# EAGLE board arduino-uno-temperature-control (EAGLE 9.7.0)

Size 273.51 x 112.33 mm. Coordinates in mm from the lower left corner, seen from the top.
Outline: 0,0 273.51,0 273.51,112.33 0,112.33 0,0
Copper layers (1*16): Top 0.035mm / dielectric 1.5mm / Bottom 0.035mm
Design rules "default": minimum track width 6mil, minimum drill 0.35mm, track to track 6mil, track to pad 6mil, pad to pad 6mil, via to via 6mil, smd to smd 6mil, copper to edge 40mil, drill to drill 6mil, minimum pad ring 10mil, minimum via ring 8mil, stop-mask expansion 4mil, vias tented up to drill 0mil, thermal gap 10mil

## Footprints (pad centres in the part's own frame; a part is rotated, then mirrored left to right if it is on the bottom)
LEDRD254W60D565H860B = drill 0.981 pad 1.581: 1 -1.27,0; 2 1.27,0
MOTOR = drill 1.118 pad 3.15 octagon: + 2.54,0; - -2.54,0
RESAD1016W63L850D250B = drill 0.83 pad 1.43: 1 -5.08,0; 2 5.08,0
HA-06-SM065 = drill 1 pad 1.676: 1 -2.54,-2.54; 2 0,2.54; 3 2.54,-2.54
SG90 = drill 1.016 long: 1 -2.54,0; 2 0,0; 3 2.54,0
ARDUINO-UNO-R3-SHIELD = drill 1.016 pad 1.88: 3.3V 24.13,-2.54; 5V 24.13,0; A0 24.13,12.7; A1 24.13,15.24; A2 24.13,17.78; A3 24.13,20.32; A4 24.13,22.86; A5 24.13,25.4; AREF -24.13,-13.97; D2 -24.13,20.32; D3 -24.13,17.78; D4 -24.13,15.24; D5 -24.13,12.7; D6 -24.13,10.16; D7 -24.13,7.62; D8 -24.13,3.81; D9 -24.13,1.27; D10 -24.13,-1.27; D11 -24.13,-3.81; D12 -24.13,-6.35; D13 -24.13,-8.89; GND@0 24.13,2.54; GND@1 24.13,5.08; GND@2 -24.13,-11.43; IOREF 24.13,-7.62; NC 24.13,-10.16; RES 24.13,-5.08; RX -24.13,25.4; SCL -24.13,-19.05; SDA -24.13,-16.51; TX -24.13,22.86; VIN 24.13,7.62
TO92 = drill 0.813 octagon: 1 -1.27,0; 2 0,1.905; 3 1.27,0
7SEG-X4-I2C = drill 1.016 long: P$1 -3.81,0; P$2 -1.27,0; P$3 1.27,0; P$4 3.81,0

## Placement (x,y rotation side)
D1  RED  [LEDRD254W60D565H860B]  206.12,8.14 180 top
D2  RED  [LEDRD254W60D565H860B]  213.74,8.14 180 top
M1  MOTOR_HDR  [MOTOR]  247.2,35.97 0 top
R1  330  [RESAD1016W63L850D250B]  207.39,18.3 90 top
R2  330  [RESAD1016W63L850D250B]  215.01,18.3 90 top
RPOT2  250k  [HA-06-SM065]  95.96,8.26 0 top
SERVO1  SERVOSG90  [SG90]  260.73,31 0 top
U1  ARDUINO-UNO-R3-SHIELD  [ARDUINO-UNO-R3-SHIELD]  110.88,82.35 270 top
U2  ARDUINO-UNO-R3-SHIELD  [ARDUINO-UNO-R3-SHIELD]  238.99,82.49 270 top
U3  TMP36GT9Z_TO92  [TO92]  126.44,26.04 0 top
U4  RED  [7SEG-X4-I2C]  28.32,39.25 0 top

## Library data of the parts
D1 D2 = Tinkercad; CATEGORY: Opto-Electronic; SUB-CATEGORY: LED; VALUE: LED_RED
M1 R1 R2 RPOT2 SERVO1 U1-U4 = Tinkercad

## Nets
D1_A: D1.1 R1.1
D2_A: D2.1 R2.1
U1_5V: RPOT2.3 U1.5V U3.3 U4.P$1
U1_A0: RPOT2.2 U1.A0
U1_A1: U1.A1 U3.2
U1_A4: U1.A4 U4.P$3
U1_A5: U1.A5 U4.P$4
U1_GND: D1.2 D2.2 RPOT2.1 SERVO1.1 U1.GND@0 U1.GND@1 U1.GND@2 U2.GND@0 U2.GND@1 U2.GND@2 U3.1 U4.P$2
U1_RX: U1.RX U2.TX
U1_TX: U1.TX U2.RX
U2_5V: SERVO1.2 U2.5V
U2_D2: M1.- U2.D2
U2_D3: M1.+ U2.D3
U2_D7: SERVO1.3 U2.D7
U2_D12: R2.2 U2.D12
U2_D13: R1.2 U2.D13

## Tracks (layer width: path | path; a pad name or v marks a point on that pad's centre or on a via)
D1_A  (1 unrouted)
D2_A  (1 unrouted)
U1_5V  (3 unrouted)
U1_A0  (1 unrouted)
U1_A1  (1 unrouted)
U1_A4  (1 unrouted)
U1_A5  (1 unrouted)
U1_GND  (11 unrouted)
U1_RX  (1 unrouted)
U1_TX  (1 unrouted)
U2_5V  (1 unrouted)
U2_D2  (1 unrouted)
U2_D3  (1 unrouted)
U2_D7  (1 unrouted)
U2_D12  (1 unrouted)
U2_D13  (1 unrouted)